# EAGLE board Middle Board (EAGLE 9.2.2)
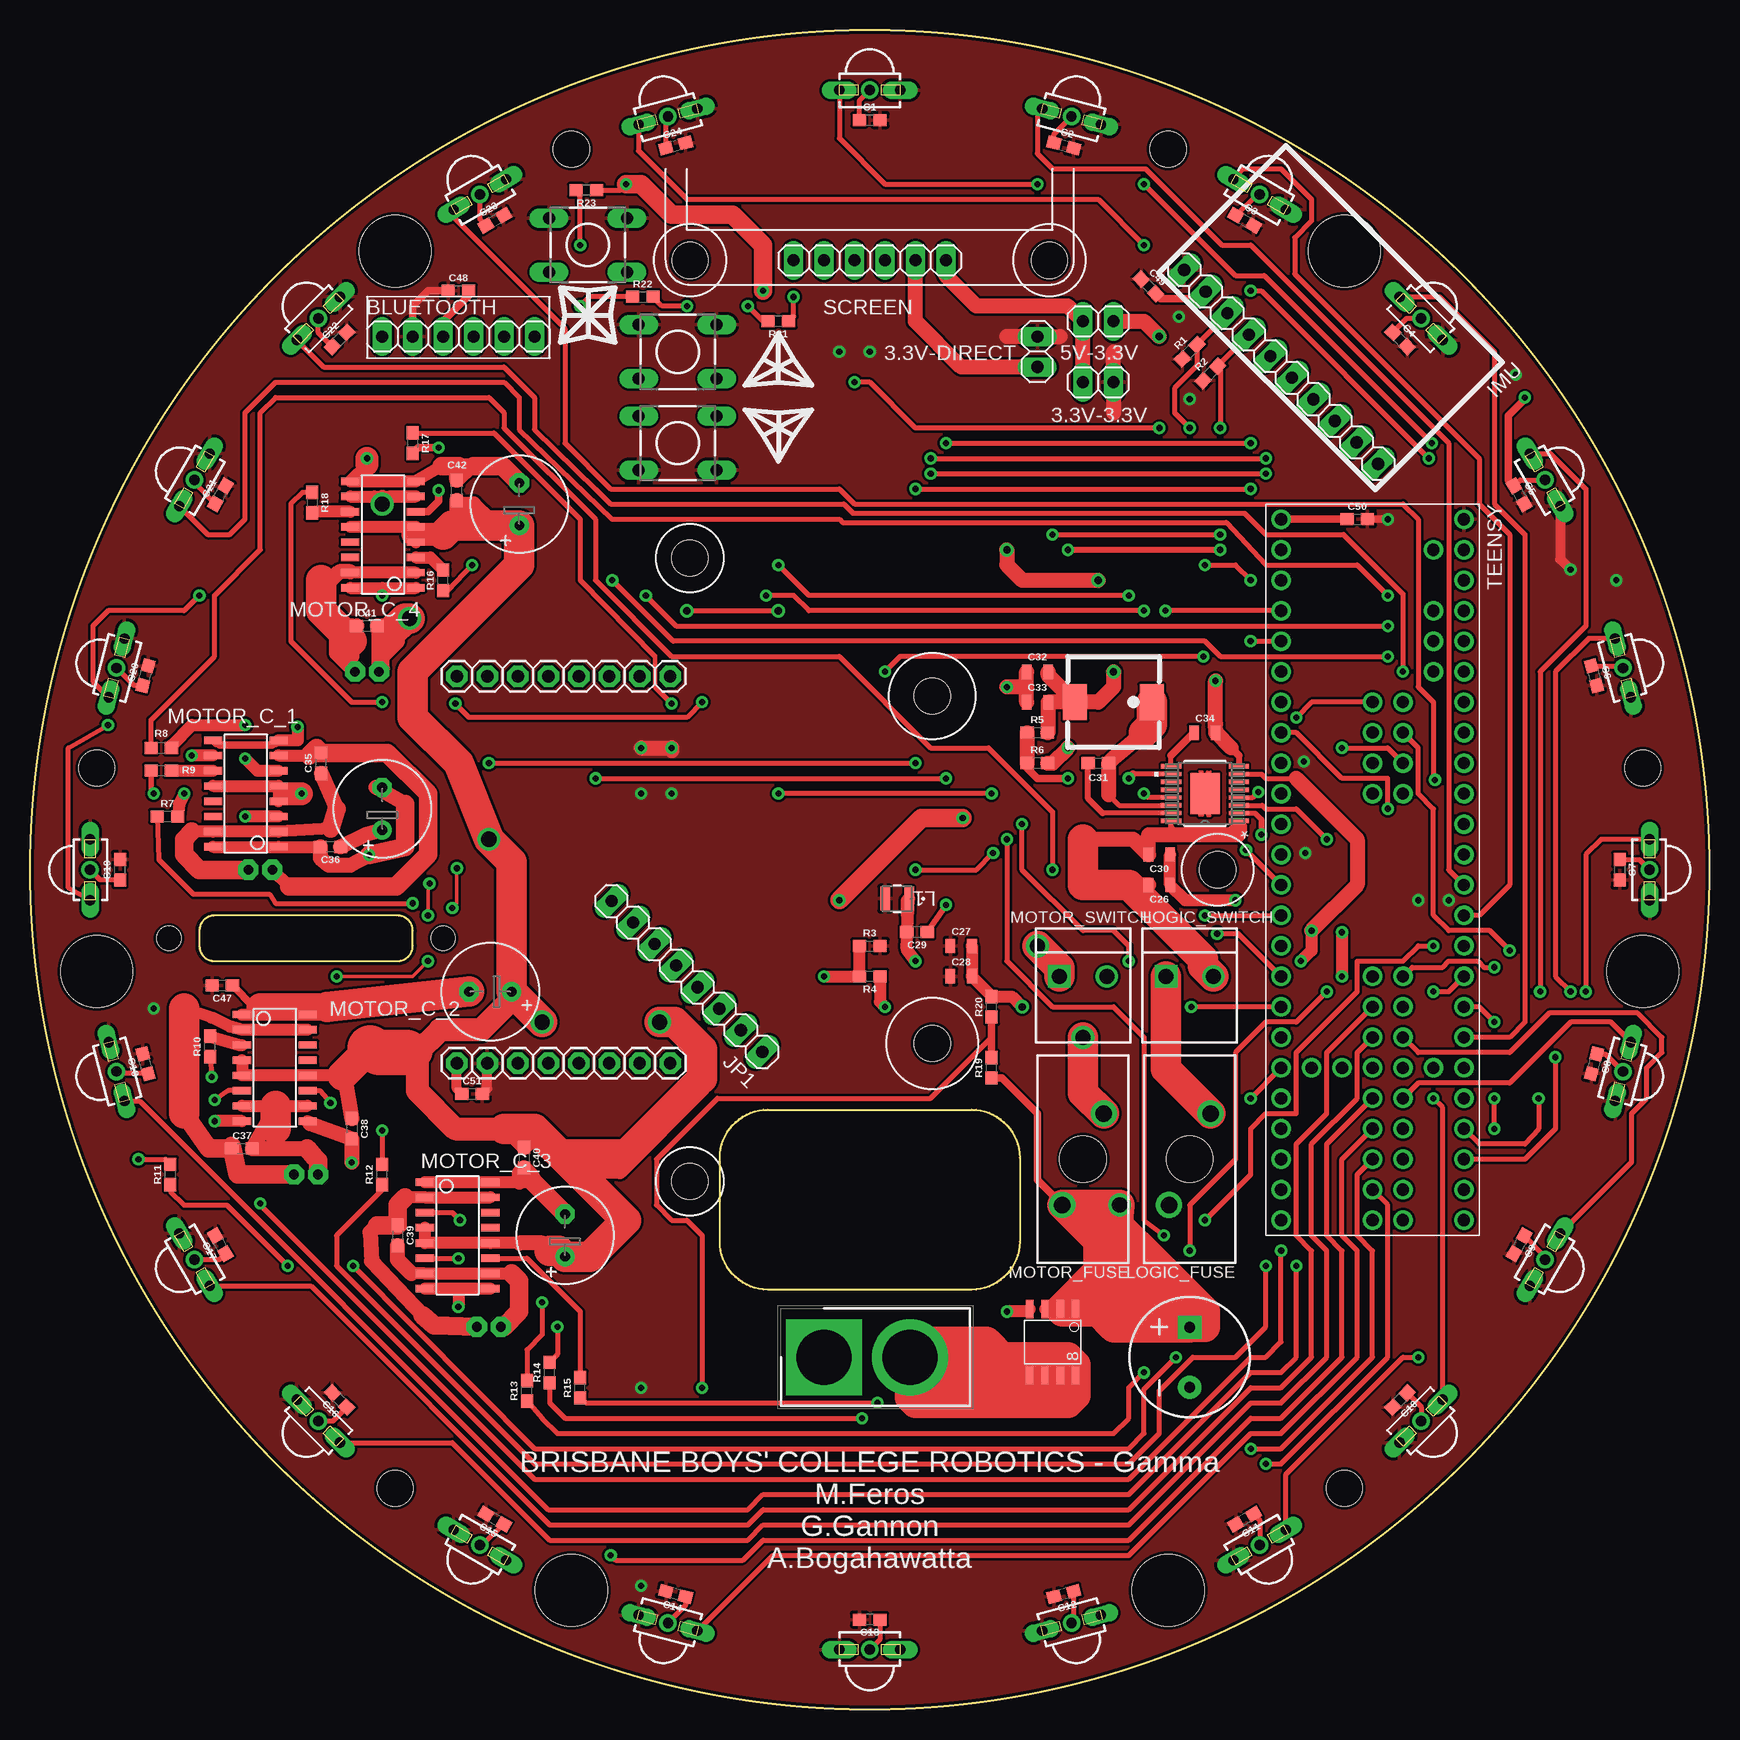
[diagram p0: board, top side]
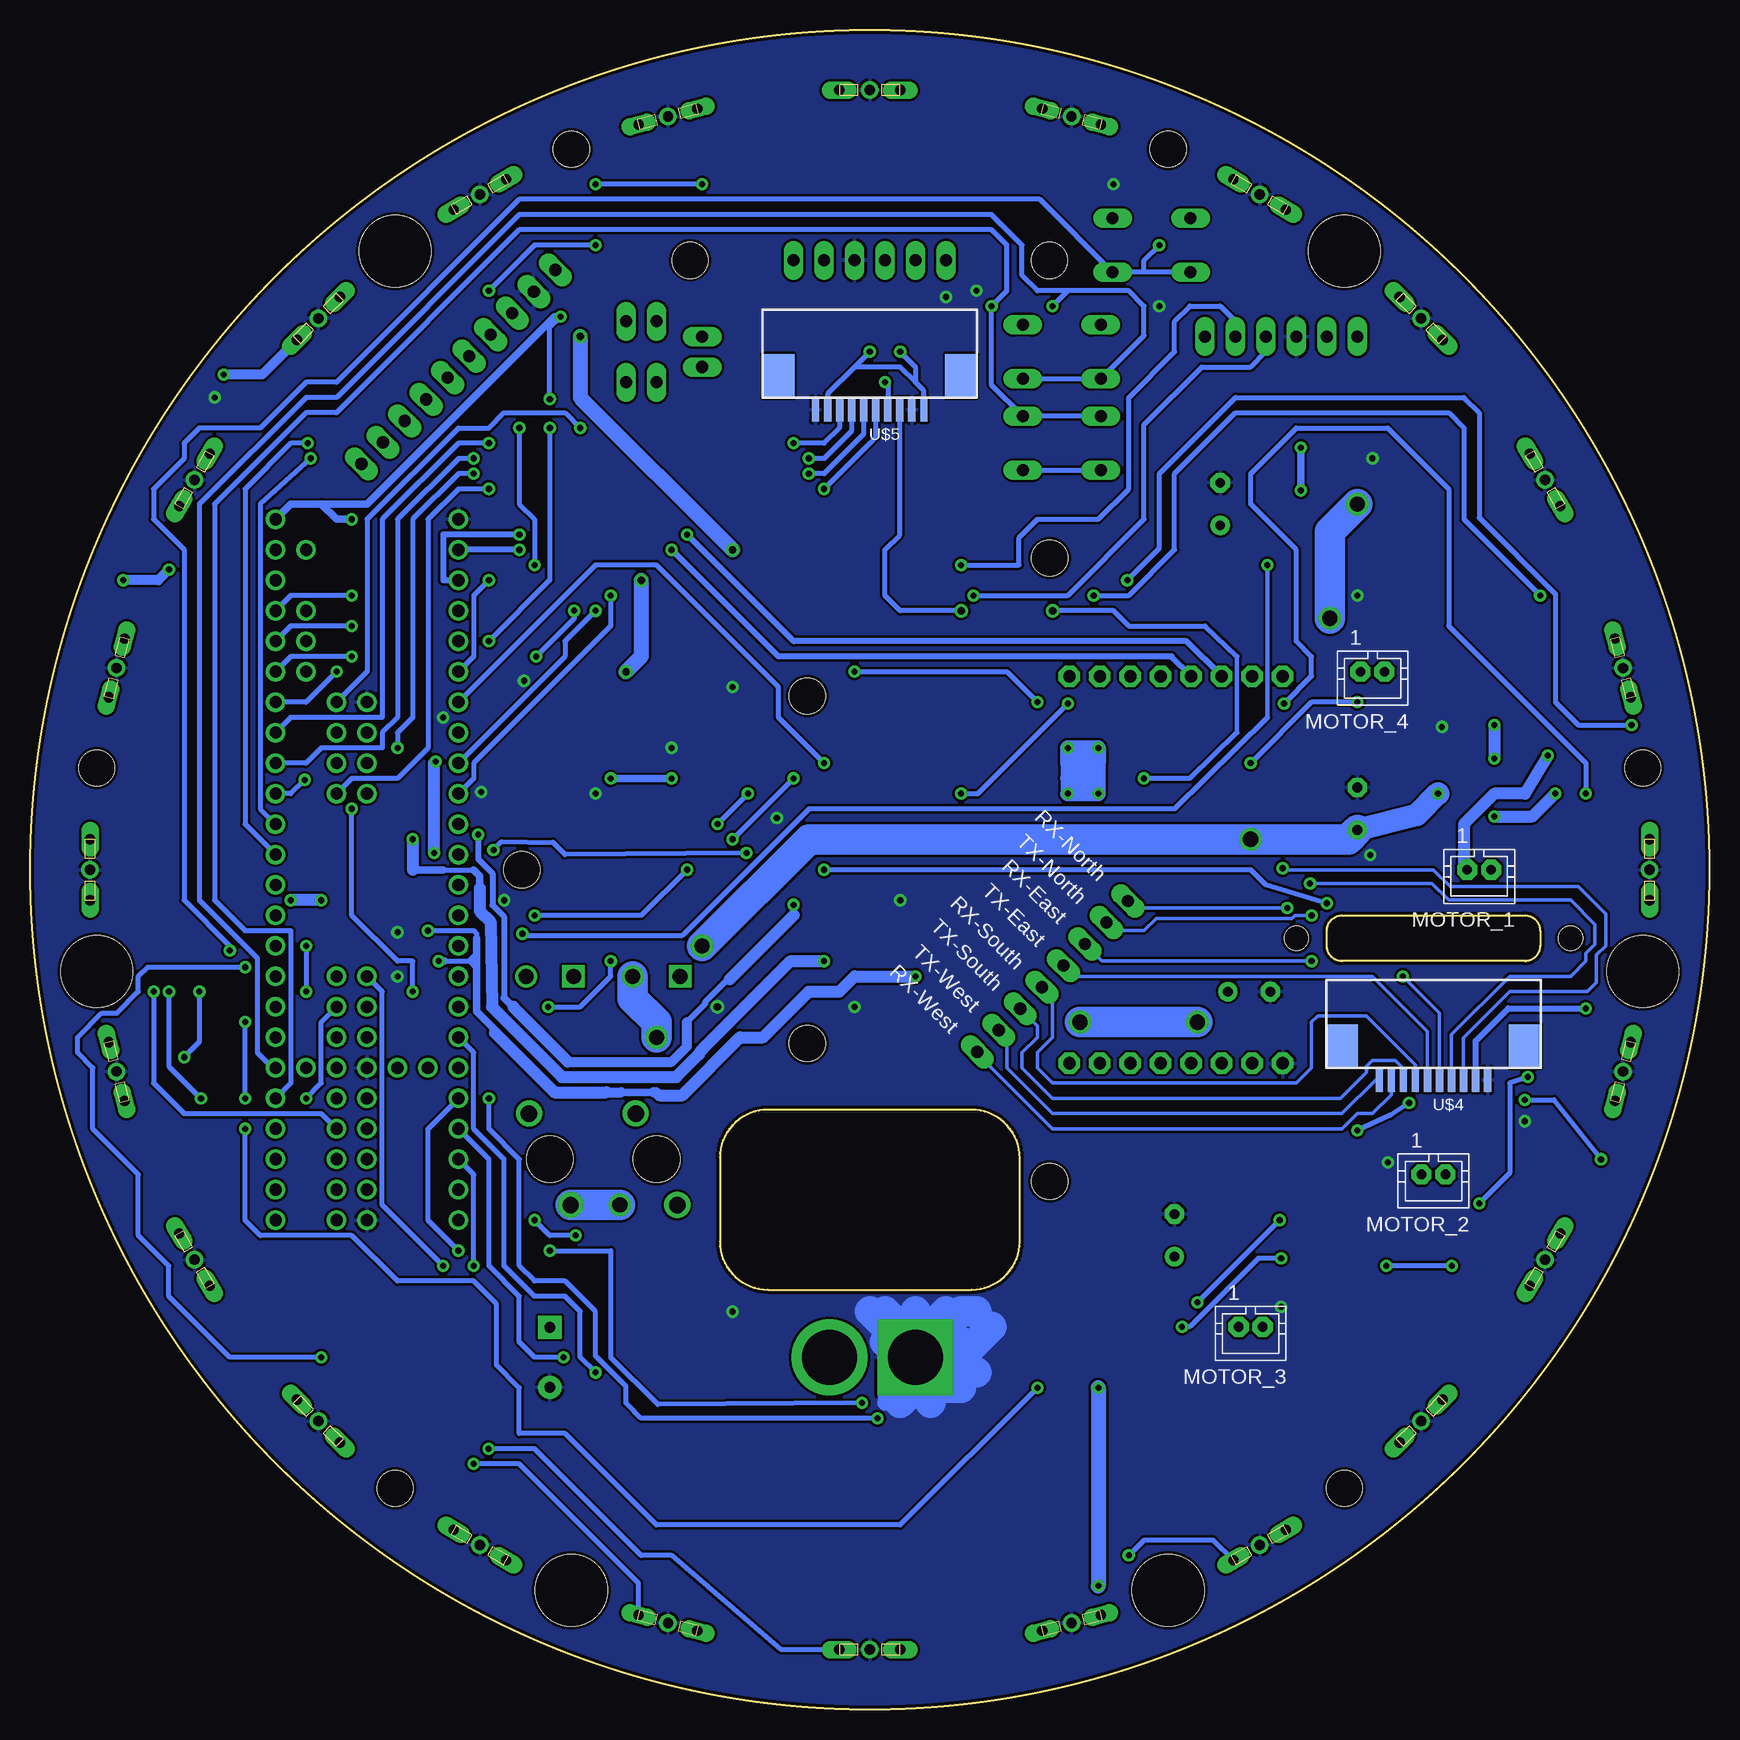
[diagram p1: board, bottom side, seen from below]

Size 140 x 140 mm. Coordinates in mm from the lower left corner, seen from the top.
Outline: 61.5,50 78.5,50 arc-90 82.5,46 82.5,39 arc-90 78.5,35 61.5,35 arc-90 57.5,39 57.5,46 arc-90 61.5,50
Outline: 14.12,64.92 14.12,63.65 arc90 15.39,62.38 30.63,62.38 arc90 31.9,63.65 31.9,64.92 arc90 30.63,66.19 15.39,66.19 arc90 14.12,64.92
Outline: circle at 70,70 radius 70
Copper layers (1*16): Top 0.035mm / dielectric 1.5mm / Bottom 0.035mm
Design rules "SparkFun": minimum track width 8mil, minimum drill 20mil, track to track 8mil, track to pad 8mil, pad to pad 8mil, via to via 8mil, smd to smd 8mil, copper to edge 10mil, drill to drill 8mil, minimum pad ring 12mil, minimum via ring 10mil, stop-mask expansion 4mil, vias tented up to drill 25mil, thermal gap 10mil
Holes 3 mm at 75.21,84.48 75.21,55.52 94.87,130.05 45.13,130.05 5.56,78.48 30.43,18.43 109.57,18.43 134.44,78.48 55,95.98 99,70 55,44.02 84.99,120.8 55.01,120.8
Holes 6 mm at 30.43,121.57 45.13,9.95 94.87,9.95 109.57,121.57 134.44,61.52 5.56,61.52
Holes 2 mm at 11.58,64.28 34.44,64.28

## Footprints (pad centres in the part's own frame; a part is rotated, then mirrored left to right if it is on the bottom)
1X02 = drill 1.016 long: 1 -1.27,0; 2 1.27,0
1X06 = drill 1.016 long: 1 -6.35,0; 2 -3.81,0; 3 -1.27,0; 4 1.27,0; 5 3.81,0; 6 6.35,0
0603 = smd 1.1 x 1: 1 -0.85,0; 2 0.85,0
CPOL-RADIAL-5MM-10MM = drill 0.9 pad 1.93 square: + 2.5,0 | drill 0.9 pad 1.93: - -2.5,0
0805 = smd 0.8 x 1.2: 1 -0.9,0; 2 0.9,0
E3,5-8 = drill 0.813 pad 1.6: + -1.778,0 | drill 0.813 pad 1.6 octagon: - 1.778,0
DTS-6 = drill 1 long: 1 -3.25,2.25; 2 3.25,2.25; 3 -3.25,-2.25; 4 3.25,-2.25
1X10 = drill 1.016 long: 1 -11.43,0; 2 -8.89,0; 3 -6.35,0; 4 -3.81,0; 5 -1.27,0; 6 1.27,0; 7 3.81,0; 8 6.35,0; 9 8.89,0; 10 11.43,0
SHDR2W320P716_1X2_1574X813X158 = drill 4.572 pad 6.35 square: 1 0,0 | drill 4.572 pad 6.35: 2 7.163,0
1X08 = drill 1.016 long: 1 -8.89,0; 2 -6.35,0; 3 -3.81,0; 4 -1.27,0; 5 1.27,0; 6 3.81,0; 7 6.35,0; 8 8.89,0
DFE252012P-1R0M=P2 = smd 0.8 x 2.007: 1 -1,0; 2 1,0
SL-1538 = drill 1.37 pad 2.184: P$1 1.73,3.81; P$2 -1.73,-3.81 | hole 3.88: 0,0
B2P-VH = drill 1.25 square: 1 -1.98,0 | drill 1.24: 2 1.98,0
JST-PH2 = drill 0.813 pad 1.676 octagon: 1 1,0; 2 -1,0
SO-16 = smd 0.61 x 1.524: 1 -4.445,-2.794; 2 -3.175,-2.794; 3 -1.905,-2.794; 4 -0.635,-2.794; 5 0.635,-2.794; 6 1.905,-2.794; 7 3.175,-2.794; 8 4.445,-2.794; 9 4.445,2.667; 10 3.175,2.667; 11 1.905,2.667; 12 0.635,2.667; 13 -0.635,2.667; 14 -1.905,2.667; 15 -3.175,2.667; 16 -4.445,2.667
OPENMV3 = drill 1.016 pad 1.778 octagon: 11 1.651,19.304; 12 1.651,16.764; 13 1.651,14.224; 14 1.651,11.684; 15 1.651,9.144; 16 1.651,6.604; 17 1.651,4.064; 18 1.651,1.524; 21 33.909,19.304; 22 33.909,16.764; 23 33.909,14.224; 24 33.909,11.684; 25 33.909,9.144; 26 33.909,6.604; 27 33.909,4.064; 28 33.909,1.524
TEENSY-3.5 = drill 1.016: 0 -7.62,26.67; 1 -7.62,24.13; 2 -7.62,21.59; 3 -7.62,19.05; 3.3V -7.62,-6.35; 3.3V-1 7.62,24.13; 3.3V-2 2.54,-29.21; 3.3V-3 -2.54,-16.51; 4 -7.62,16.51; 5 -7.62,13.97; 6 -7.62,11.43; 7 -7.62,8.89; 8 -7.62,6.35; 9 -7.62,3.81; 10 -7.62,1.27; 11 -7.62,-1.27; 12 -7.62,-3.81; 13 7.62,-3.81; 14 7.62,-1.27; 15 7.62,1.27; 16 7.62,3.81; 17 7.62,6.35; 18 7.62,8.89; 19 7.62,11.43; 20 7.62,13.97; 21 7.62,16.51; 22 7.62,19.05; 23 7.62,21.59; 24 -7.62,-8.89; 25 -7.62,-11.43; 26 -7.62,-13.97; 27 -7.62,-16.51; 28 -7.62,-19.05; 29 -7.62,-21.59; 30 -7.62,-24.13; 31 -7.62,-26.67; 32 -7.62,-29.21; 33 7.62,-29.21; 34 7.62,-26.67; 35 7.62,-24.13; 36 7.62,-21.59; 37 7.62,-19.05; 38 7.62,-16.51; 39 7.62,-13.97; 40 0,-8.89; 41 0,-11.43; 42 0,-13.97; 43 0,-19.05; 44 0,-21.59; 45 0,-24.13; 46 0,-26.67; 47 2.54,-26.67; 48 2.54,-24.13; 49 2.54,-21.59; 50 2.54,-19.05; 51 2.54,-13.97; 52 2.54,-11.43; 53 2.54,-8.89; 54 2.54,6.35; 55 2.54,8.89; 56 2.54,11.43; 57 2.54,13.97; A10 5.08,19.05; A11 5.08,16.51; AGND 7.62,26.67; AREF 5.08,21.59; DA0 7.62,-11.43; DA1 7.62,-8.89; DC 0,8.89; DD 0,6.35; DE 0,11.43; GND -7.62,29.21; GND-1 7.62,-6.35; GND-2 0,-29.21; GND-3 0,-16.51; GND-4 0,13.97; PRGRM 2.54,-16.51; RESET 5.08,-16.51; VBAT -5.08,-16.51; VIN 7.62,29.21; VUSB 5.08,26.67
MINICAST = drill 0.85 long: 1 0,2.54; 3 0,-2.54 | drill 0.85: 2 0,0
PWP16_3P4X2P46 = smd 1.676 x 0.356: 1 -2.819,2.275; 2 -2.819,1.625; 3 -2.819,0.975; 4 -2.819,0.325; 5 -2.819,-0.325; 6 -2.819,-0.975; 7 -2.819,-1.625; 8 -2.819,-2.275; 9 2.819,-2.275; 10 2.819,-1.625; 11 2.819,-0.975; 12 2.819,-0.325; 13 2.819,0.325; 14 2.819,0.975; 15 2.819,1.625; 16 2.819,2.275 | smd 2.46 x 3.4: 17 0,0
SO-8 = smd 1.524 x 0.61: 1 -2.743,1.905; 2 -2.743,0.635; 3 -2.743,-0.635; 4 -2.743,-1.905; 5 2.743,-1.905; 6 2.743,-0.635; 7 2.743,0.635; 8 2.743,1.905
DS75LC = smd 2 x 3: P$1 3.2,0; P$2 -3.2,0
FPC10 = smd 0.61 x 2.007: 1 -4.515,1.003; 2 -3.512,1.003; 3 -2.508,1.003; 4 -1.505,1.003; 5 -0.502,1.003; 6 0.502,1.003; 7 1.505,1.003; 8 2.508,1.003; 9 3.512,1.003; 10 4.515,1.003 | smd 2.667 x 3.607: N/C-1 -7.62,-1.803; N/C-2 7.62,-1.803

## Placement (x,y rotation side)
3.3V-3.3V  [1X02]  89.05,110.64 180 top
3.3V-DIRECT  [1X02]  83.97,113.18 270 top
5V-3.3V  [1X02]  89.05,115.72 180 top
BLUETOOTH  [1X06]  35.71,114.45 0 top
C1  0.1uF  [0603]  70,132.5 0 top
C2  0.1uF  [0603]  86.18,130.37 345 top
C3  0.1uF  [0603]  101.25,124.13 330 top
C4  0.1uF  [0603]  114.19,114.19 315 top
C5  0.1uF  [0603]  124.13,101.25 300 top
C6  0.1uF  [0603]  130.37,86.18 285 top
C7  0.1uF  [0603]  132.5,70 270 top
C8  0.1uF  [0603]  130.37,53.82 255 top
C9  0.1uF  [0603]  124.13,38.75 240 top
C10  0.1uF  [0603]  114.19,25.81 225 top
C11  0.1uF  [0603]  101.25,15.87 210 top
C12  0.1uF  [0603]  86.18,9.63 195 top
C13  0.1uF  [0603]  70,7.5 180 top
C14  0.1uF  [0603]  53.82,9.63 165 top
C15  0.1uF  [0603]  38.75,15.87 150 top
C16  0.1uF  [0603]  25.81,25.81 135 top
C17  0.1uF  [0603]  15.87,38.75 120 top
C18  0.1uF  [0603]  9.63,53.82 105 top
C19  0.1uF  [0603]  7.5,70 90 top
C20  0.1uF  [0603]  9.63,86.18 75 top
C21  0.1uF  [0603]  15.87,101.25 60 top
C22  0.1uF  [0603]  25.81,114.19 45 top
C23  0.1uF  [0603]  38.75,124.13 30 top
C24  0.1uF  [0603]  53.82,130.37 15 top
C25  1mF  [CPOL-RADIAL-5MM-10MM]  96.67,29.36 90 top
C26  10uF  [0805]  94.13,68.73 180 top
C27  22uF  [0805]  77.62,63.65 0 top
C28  22uF  [0805]  77.62,61.11 0 top
C29  0.1uF  [0603]  73.94,64.79 180 top
C30  10uF  [0805]  94.13,71.27 180 top
C31  0.1uF  [0603]  89.05,78.89 0 top
C32  22uF  [0805]  83.97,86.51 180 top
C33  22uF  [0805]  83.97,83.97 180 top
C34  1.0uF  [0805]  97.94,81.43 0 top
C35  0.1uF  [0603]  24.28,78.89 90 top
C36  0.1uF  [0603]  25.04,71.91 180 top
C37  0.1uF  [0603]  17.68,46.76 0 top
C38  0.1uF  [0603]  26.82,48.41 270 top
C39  0.1uF  [0603]  30.63,39.52 270 top
C40  0.1uF  [0603]  41.17,46 270 top
C41  0.1uF  [0603]  28.09,90.32 0 top
C42  0.1uF  [0603]  35.58,101.62 90 top
C43  470uF  [E3,5-8]  29.36,75.08 90 top
C44  470uF  [E3,5-8]  38.38,59.84 180 top
C45  470uF  [E3,5-8]  44.6,39.52 90 top
C46  470uF  [E3,5-8]  40.79,100.48 90 top
C47  0.1uF  [0603]  16.02,60.35 180 top
C48  0.1uF  [0603]  35.71,118.26 0 top
C49  0.1uF  [0603]  93.23,118.63 315 top
C50  0.1uF  [0603]  110.64,99.21 0 top
C51  0.1uF  [0603]  36.85,51.33 0 top
DOWN  DTS-6  [DTS-6]  54,113.18 0 top
IMU  [1X10]  104.29,111.91 315 top
J1  PRT-10474  [SHDR2W320P716_1X2_1574X813X158]  66.19,29.36 0 top
JP1  [1X08]  54.76,61.11 135 top
L1  DFE252012P-2R2M=P2  [DFE252012P-1R0M=P2]  72.29,67.59 180 top
LOGIC_FUSE  FUSE_MINI_BLADE  [SL-1538]  96.67,45.87 180 top
LOGIC_SWITCH  CONN_02_JST-VH  [B2P-VH]  96.67,61.11 0 top
MOTOR_1  [JST-PH2]  19.2,70 180 bottom
MOTOR_2  [JST-PH2]  23.01,44.6 180 bottom
MOTOR_3  [JST-PH2]  38.25,31.9 180 bottom
MOTOR_4  [JST-PH2]  28.09,86.51 180 bottom
MOTOR_C_1  VNH7100BASTR  [SO-16]  17.93,76.35 90 top
MOTOR_C_2  VNH7100BASTR  [SO-16]  20.47,53.49 270 top
MOTOR_C_3  VNH7100BASTR  [SO-16]  35.71,39.52 270 top
MOTOR_C_4  VNH7100BASTR  [SO-16]  29.36,97.94 90 top
MOTOR_FUSE  FUSE_MINI_BLADE  [SL-1538]  87.78,45.87 180 top
MOTOR_SWITCH  CONN_02_JST-VH  [B2P-VH]  87.78,61.11 0 top
OPEN-MV  OPENMV3  [OPENMV3]  34.06,87.78 270 top
R1  10k  [0603]  96.67,113.18 45 top
R2  10k  [0603]  98.4,111.38 45 top
R3  72.3  [0603]  70,63.65 0 top
R4  22.1  [0603]  70,61.11 180 top
R5  124  [0603]  83.97,81.43 0 top
R6  22.1  [0603]  83.97,78.89 180 top
R7  1k  [0603]  11.45,74.44 0 top
R8  1k  [0603]  10.95,80.16 0 top
R9  1k  [0603]  10.95,78.25 0 top
R10  1k  [0603]  15.01,55.27 90 top
R11  1k  [0603]  11.71,44.6 90 top
R12  1k  [0603]  29.36,44.6 90 top
R13  1k  [0603]  41.42,26.57 90 top
R14  1k  [0603]  43.33,28.09 90 top
R15  1k  [0603]  45.87,26.82 90 top
R16  1k  [0603]  34.44,94.13 90 top
R17  1k  [0603]  31.9,105.56 270 top
R18  1k  [0603]  23.52,100.61 270 top
R19  35.7kOhm  [0603]  80.16,53.49 90 top
R20  10.2kOhm  [0603]  80.16,58.57 90 top
R21  10k  [0603]  62.38,115.72 180 top
R22  10k  [0603]  51.08,117.75 0 top
R23  10k  [0603]  46.38,126.64 180 top
SCREEN  [1X06]  70,120.8 0 top
SELECT  DTS-6  [DTS-6]  46.5,122.07 0 top
TEENSY  TEENSY-3.5  [TEENSY-3.5]  111.91,70 0 top
TSSP1  TSSP58038  [MINICAST]  70,135 270 top
TSSP2  TSSP58038  [MINICAST]  86.82,132.79 255 top
TSSP3  TSSP58038  [MINICAST]  102.5,126.29 240 top
TSSP4  TSSP58038  [MINICAST]  115.96,115.96 225 top
TSSP5  TSSP58038  [MINICAST]  126.29,102.5 210 top
TSSP6  TSSP58038  [MINICAST]  132.79,86.82 195 top
TSSP7  TSSP58038  [MINICAST]  135,70 180 top
TSSP8  TSSP58038  [MINICAST]  132.79,53.18 165 top
TSSP9  TSSP58038  [MINICAST]  126.29,37.5 150 top
TSSP10  TSSP58038  [MINICAST]  115.96,24.04 135 top
TSSP11  TSSP58038  [MINICAST]  102.5,13.71 120 top
TSSP12  TSSP58038  [MINICAST]  86.82,7.21 105 top
TSSP13  TSSP58038  [MINICAST]  70,5 90 top
TSSP14  TSSP58038  [MINICAST]  53.18,7.21 75 top
TSSP15  TSSP58038  [MINICAST]  37.5,13.71 60 top
TSSP16  TSSP58038  [MINICAST]  24.04,24.04 45 top
TSSP17  TSSP58038  [MINICAST]  13.71,37.5 30 top
TSSP18  TSSP58038  [MINICAST]  7.21,53.18 15 top
TSSP19  TSSP58038  [MINICAST]  5,70 0 top
TSSP20  TSSP58038  [MINICAST]  7.21,86.82 345 top
TSSP21  TSSP58038  [MINICAST]  13.71,102.5 330 top
TSSP22  TSSP58038  [MINICAST]  24.04,115.96 315 top
TSSP23  TSSP58038  [MINICAST]  37.5,126.29 300 top
TSSP24  TSSP58038  [MINICAST]  53.18,132.79 285 top
U1  TPS54394PWPR  [PWP16_3P4X2P46]  97.94,76.35 180 top
U$2  SI4143DY  [SO-8]  85.24,30.63 270 top
U$3  DS75LC  [DS75LC]  90.32,83.97 180 top
U$4  FPC10  [FPC10]  23.01,53.49 180 bottom
U$5  FPC10  [FPC10]  70,109.37 180 bottom
UP  DTS-6  [DTS-6]  54,105.56 180 top

## Library data of the parts
3.3V-3.3V 3.3V-DIRECT 5V-3.3V BLUETOOTH IMU JP1 SCREEN = PinHead+
C1-C24 C35-C42 C47-C51 = SparkFun-Capacitors; PROD_ID: CAP-00810
C25 = SparkFun-Capacitors; PROD_ID: CAP-09538
C26 C30 = SparkFun-Capacitors; PROD_ID: CAP-11330
C27 C28 C32 C33 = SparkFun-Capacitors; PROD_ID: CAP-08402
C29 C31 = SparkFun-Capacitors; PROD_ID: CAP-08604
C34 = SparkFun-Capacitors; PROD_ID: CAP-08064
C43-C46 = adafruit
DOWN SELECT UP = switch-tact
J1 = XT60; ARROW_PART_NUMBER: PRT-10474; DESCRIPTION: Soldering Workstation Equipment XT60 Connectors Male/Female Pair; HEIGHT: 15.875mm; MANUFACTURER_NAME: SparkFun; MANUFACTURER_PART_NUMBER: PRT-10474
L1 = Inductor; MANUFACTURER_PART_NUMBER: DFE252012P2R2M=P2; VENDOR: Murata
LOGIC_FUSE MOTOR_FUSE = Fuse_Holder
LOGIC_SWITCH MOTOR_SWITCH = JST-VH
MOTOR_1-MOTOR_4 = jst-ph
MOTOR_C_1-MOTOR_C_4 = VNH7100BASTR
OPEN-MV = OpenMV
R1 R2 R21-R23 = SparkFun-Resistors; PROD_ID: RES-00824
R3-R6 R19 R20 = SparkFun-Resistors; PROD_ID: RES-09737
R7-R18 = SparkFun-Resistors; PROD_ID: RES-07856
TEENSY = teensy-3.5
TSSP1-TSSP24 = IR Receivers
U1 = TPS54394PWP; MANUFACTURER_PART_NUMBER: TPS54394PWPR; VENDOR: Texas Instruments
U$2 = MOSFET
U$3 = Inductor
U$4 U$5 = FFC

## Nets
3.3V: 3.3V-3.3V.1 3.3V-DIRECT.1 BLUETOOTH.2 C1.2 C2.2 C3.2 C4.2 C5.2 C6.2 C7.2 C8.2 C9.2 C10.2 C11.2 C12.2 C13.2 C14.2 C15.2 C16.2 C17.2 C18.2 C19.2 C20.2 C21.2 C22.2 C23.2 C24.2 C27.1 C28.1 C47.2 C48.1 C49.1 C50.2 C51.2 DOWN.1 DOWN.2 IMU.1 L1.2 OPEN-MV.27 R1.1 R2.1 R3.2 SELECT.1 SELECT.2 TEENSY.VIN TSSP1.1 TSSP2.1 TSSP3.1 TSSP4.1 TSSP5.1 TSSP6.1 TSSP7.1 TSSP8.1 TSSP9.1 TSSP10.1 TSSP11.1 TSSP12.1 TSSP13.1 TSSP14.1 TSSP15.1 TSSP16.1 TSSP17.1 TSSP18.1 TSSP19.1 TSSP20.1 TSSP21.1 TSSP22.1 TSSP23.1 TSSP24.1 U$4.2 U$5.1 U$5.9 UP.1 UP.2
5V: 5V-3.3V.1 C32.1 C33.1 R5.2 U$3.P$1
12V: C36.1 C38.1 C40.1 C42.1 C43.+ C44.+ C45.+ C46.+ MOTOR_C_1.4 MOTOR_C_1.5 MOTOR_C_1.12 MOTOR_C_2.4 MOTOR_C_2.5 MOTOR_C_2.12 MOTOR_C_3.4 MOTOR_C_3.5 MOTOR_C_3.12 MOTOR_C_4.4 MOTOR_C_4.5 MOTOR_C_4.12 MOTOR_SWITCH.1
BATTERY-VOLTAGE(ANALOG): R19.2 R20.1 TEENSY.DA0
BDOWN: DOWN.3 DOWN.4 R22.2 TEENSY.38
BSELECT: R23.2 SELECT.3 SELECT.4 TEENSY.56
BUP: R21.2 TEENSY.37 UP.3 UP.4
GND: BLUETOOTH.3 C1.1 C2.1 C3.1 C4.1 C5.1 C6.1 C7.1 C8.1 C9.1 C10.1 C11.1 C12.1 C13.1 C14.1 C15.1 C16.1 C17.1 C18.1 C19.1 C20.1 C21.1 C22.1 C23.1 C24.1 C25.- C26.1 C27.2 C28.2 C30.1 C32.2 C33.2 C34.2 C36.2 C38.2 C40.2 C42.2 C43.- C44.- C45.- C46.- C47.1 C48.2 C49.2 C50.1 C51.1 IMU.2 J1.1 MOTOR_C_1.1 MOTOR_C_1.8 MOTOR_C_1.9 MOTOR_C_1.16 MOTOR_C_2.1 MOTOR_C_2.8 MOTOR_C_2.9 MOTOR_C_2.16 MOTOR_C_3.1 MOTOR_C_3.8 MOTOR_C_3.9 MOTOR_C_3.16 MOTOR_C_4.1 MOTOR_C_4.8 MOTOR_C_4.9 MOTOR_C_4.16 OPEN-MV.28 R4.1 R6.1 R20.2 R21.1 R22.1 R23.1 SCREEN.4 TEENSY.GND TEENSY.GND-2 TEENSY.GND-3 TEENSY.GND-4 TSSP1.2 TSSP2.2 TSSP3.2 TSSP4.2 TSSP5.2 TSSP6.2 TSSP7.2 TSSP8.2 TSSP9.2 TSSP10.2 TSSP11.2 TSSP12.2 TSSP13.2 TSSP14.2 TSSP15.2 TSSP16.2 TSSP17.2 TSSP18.2 TSSP19.2 TSSP20.2 TSSP21.2 TSSP22.2 TSSP23.2 TSSP24.2 U1.4 U1.8 U1.13 U$2.4 U$4.1 U$5.2 U$5.10
LS-CONTROL1: TEENSY.19 U$5.8
LS-CONTROL2: TEENSY.18 U$5.7
LS-CONTROL3: TEENSY.55 U$5.6
LS-CONTROL4: TEENSY.54 U$5.5
LS-CONTROL5: TEENSY.57 U$5.4
LS-OUTPUT: TEENSY.DA1 U$5.3
MOTOR-BL(ENA): R16.1 TEENSY.24
MOTOR-BL(ENB): R17.1 TEENSY.25
MOTOR-BL(PWM): R18.1 TEENSY.5
MOTOR-BR(ENA): R13.1 TEENSY.26
MOTOR-BR(ENB): R14.1 TEENSY.27
MOTOR-BR(PWM): R15.1 TEENSY.6
MOTOR-FL(ENA): R7.1 TEENSY.11
MOTOR-FL(ENB): R8.1 TEENSY.12
MOTOR-FL(PWM): R9.1 TEENSY.2
MOTOR-FR(ENA): R10.1 TEENSY.28
MOTOR-FR(ENB): R11.1 TEENSY.29
MOTOR-FR(PWM): R12.1 TEENSY.30
N$1: J1.2 U$2.5 U$2.6 U$2.7 U$2.8
N$2: MOTOR_FUSE.P$2 MOTOR_SWITCH.2
N$3: C25.+ LOGIC_FUSE.P$1 MOTOR_FUSE.P$1 R19.1 U$2.1 U$2.2 U$2.3
N$4: LOGIC_FUSE.P$2 LOGIC_SWITCH.1
N$5: MOTOR_C_1.3 R7.2
N$6: C29.1 U1.2
N$7: C29.2 L1.1 U1.3
N$8: C31.1 U1.15
N$9: R3.1 R4.2 U1.7
N$10: C31.2 U1.14 U$3.P$2
N$11: C34.1 U1.9
N$12: MOTOR_C_1.6 R8.2
N$13: C26.2 C30.2 LOGIC_SWITCH.2 U1.1 U1.16
N$14: R5.1 R6.2 U1.10
N$15: MOTOR_C_1.11 R9.2
N$16: C35.1 MOTOR_1.2 MOTOR_C_1.2 MOTOR_C_1.15
N$17: C35.2 MOTOR_1.1 MOTOR_C_1.7 MOTOR_C_1.10
N$18: MOTOR_C_2.3 R10.2
N$19: MOTOR_C_2.6 R11.2
N$20: MOTOR_C_2.11 R12.2
N$21: C37.1 MOTOR_2.2 MOTOR_C_2.2 MOTOR_C_2.15
N$22: C37.2 MOTOR_2.1 MOTOR_C_2.7 MOTOR_C_2.10
N$23: MOTOR_C_3.3 R13.2
N$24: MOTOR_C_3.6 R14.2
N$25: MOTOR_C_3.11 R15.2
N$26: C39.1 MOTOR_3.2 MOTOR_C_3.2 MOTOR_C_3.15
N$27: C39.2 MOTOR_3.1 MOTOR_C_3.7 MOTOR_C_3.10
N$28: MOTOR_C_4.3 R16.2
N$29: MOTOR_C_4.6 R17.2
N$30: MOTOR_C_4.11 R18.2
N$31: C41.1 MOTOR_4.2 MOTOR_C_4.2 MOTOR_C_4.15
N$32: C41.2 MOTOR_4.1 MOTOR_C_4.7 MOTOR_C_4.10
N$33: TEENSY.47
N$34: TEENSY.31
N$35: 3.3V-DIRECT.2 SCREEN.5
N$36: TEENSY.32
N$37: 3.3V-3.3V.2 5V-3.3V.2 SCREEN.6
N$38: TEENSY.9
N$39: TEENSY.10
N$46: TEENSY.48
RX(BLUETOOTH): BLUETOOTH.5 TEENSY.8
RX(CAM): OPEN-MV.16 TEENSY.1
RXE: JP1.6 U$4.5
RXN: JP1.8 U$4.3
RXS: JP1.4 U$4.7
RXW: JP1.1 U$4.9
SCL(IMU): IMU.3 R1.2 TEENSY.3
SCREEN(SCL): SCREEN.2
SCREEN(SDA): SCREEN.1
SDA(IMU): IMU.4 R2.2 TEENSY.4
TSSP1: TEENSY.15 TSSP1.3
TSSP2: TEENSY.14 TSSP2.3
TSSP3: TEENSY.13 TSSP3.3
TSSP4: TEENSY.39 TSSP4.3
TSSP5: TEENSY.35 TSSP5.3
TSSP6: TEENSY.36 TSSP6.3
TSSP7: TEENSY.49 TSSP7.3
TSSP8: TEENSY.50 TSSP8.3
TSSP9: TEENSY.51 TSSP9.3
TSSP10: TEENSY.52 TSSP10.3
TSSP11: TEENSY.53 TSSP11.3
TSSP12: TEENSY.46 TSSP12.3
TSSP13: TEENSY.45 TSSP13.3
TSSP14: TEENSY.44 TSSP14.3
TSSP15: TEENSY.43 TSSP15.3
TSSP16: TEENSY.42 TSSP16.3
TSSP17: TEENSY.41 TSSP17.3
TSSP18: TEENSY.40 TSSP18.3
TSSP19: TEENSY.21 TSSP19.3
TSSP20: TEENSY.22 TSSP20.3
TSSP21: TEENSY.23 TSSP21.3
TSSP22: TEENSY.20 TSSP22.3
TSSP23: TEENSY.17 TSSP23.3
TSSP24: TEENSY.16 TSSP24.3
TX(BLUETOOTH): BLUETOOTH.4 TEENSY.7
TX(CAM): OPEN-MV.15 TEENSY.0
TXE: JP1.5 U$4.6
TXN: JP1.7 U$4.4
TXS: JP1.3 U$4.8
TXW: JP1.2 U$4.10
UU: TEENSY.34
UU2: TEENSY.33

## Tracks (layer width: path | path; a pad name or v marks a point on that pad's centre or on a via)
3.3V  (via drill 0.51)
  Top 0.61: v113.18,99.21 C50.2 | C48.1 33.17,118.26 31.9,116.99 BLUETOOTH.2
  Top 0.813: TSSP5.1 127.56,95.88 v128.42,95.02 | C51.2 38.12,51.75 OPEN-MV.27
  Top 1.27: 85.88,114.45 3.3V-DIRECT.1 81.43,114.45 | 90.32,113.18 3.3V-3.3V.1 90.32,108.1 | v50.95,80.16 v53.49,80.16 53.49,79.93
  Bottom 0.406: UP.1 UP.2 | v96.67,109.24 96.67,115.21 v95.78,116.1 | U$5.1 65.48,109.94 66.19,110.64 | U$5.9 73.51,109.67 71.27,111.91 | 66.19,110.64 67.46,111.91 71.27,111.91 | 71.27,111.91 v70,113.18 | v67.46,113.18 66.19,111.91 66.19,110.64
  Bottom 0.508: U$4.2 19.5,55.73 16.79,58.44 v10.31,58.44
  Bottom 0.61: TEENSY.VIN 118.26,100.48 115.72,100.48 | v95.78,116.1 96.29,116.1 111.91,100.48 115.72,100.48 | 115.72,100.48 114.45,99.21 v113.18,99.21
  Bottom 0.813: TSSP4.1 120.65,111.28 v123.85,111.28 | v128.42,95.02 129.31,94.13 v132.23,94.13
  Bottom 1.016: v106.32,71.4 106.32,78.89 v106.19,79.02 | v115.72,67.46 v118.26,67.46
  Bottom 1.27: v50.95,26.82 v50.95,10.31 | v50.95,80.16 v53.49,80.16 | v53.49,80.16 v53.49,76.35 | v53.49,76.35 v50.95,76.35 | v50.95,76.35 v50.95,80.16 | v50.95,80.16 50.95,78.89 v53.49,76.35 | v50.95,76.35 50.95,77.62 v53.49,80.16 | v50.95,80.16 53.49,77.62 v53.49,76.35 | v50.95,76.35 53.49,78.89 v53.49,80.16
  pour Top: 68.73,152.55 39.52,152.55 -10.01,103.02 -10.01,29.36 29.36,-10.01 133.5,-10.01 137.31,-13.82 171.6,20.47 171.6,73.81 171.6,109.37 152.55,128.42 128.42,152.55
5V  (via drill 0.61)
  Top 1.27: U$3.P$1 84.87,86.22 C32.1 | U$3.P$1 C33.1 84.87,81.48 R5.2 | 5V-3.3V.1 92.86,115.72 v94.13,114.45 | v81.43,96.67 81.43,95.4 82.7,94.13 v89.05,94.13 | v90.32,86.51 90.32,85.24 89.05,83.97 U$3.P$1
  Bottom 1.27: v94.13,114.45 94.13,109.37 v81.43,96.67 | v90.32,86.51 89.05,87.78 v89.05,94.13
12V  (via drill 0.51, 1.27)
  Top 1.016: MOTOR_C_1.12 MOTOR_C_1.5 | MOTOR_C_1.5 MOTOR_C_1.4 | MOTOR_C_1.5 21.36,76.35 | 26.06,52.86 MOTOR_C_2.12 MOTOR_C_2.5 MOTOR_C_2.4 | 40.79,38.89 MOTOR_C_3.12 MOTOR_C_3.5 MOTOR_C_3.4 | MOTOR_C_4.4 31.9,97.56 31.9,97.94 31.9,98.32 MOTOR_C_4.5 MOTOR_C_4.12
  Top 1.27: C36.1 28.09,72.96 C43.+ | 26.06,52.86 26.19,52.94 C38.1 | 43.33,38.25 42.7,38.89 40.79,38.89 | 35.2,98.7 35.58,99.08 C42.1 35.88,100.48 36.98,100.48 38.25,99.21 38.25,98.7 | 42.06,48.41 42.06,47.74 C40.1 39.61,48.41 | 56.03,52.6 49.3,45.87 44.6,45.87 | 56.03,52.6 56.03,51.71 49.17,44.85 45.62,44.85 | 56.03,52.6 55.14,52.6 49.43,46.89 44.73,46.89
  Top 1.905: 21.36,76.35 v22.63,76.35 | 34.44,97.94 31.9,97.94 | C44.+ 40.16,59.2 37.62,56.66 34.19,56.66 32.28,54.76 32.28,51.59 35.46,48.41 39.61,48.41
  Top 2.54: MOTOR_SWITCH.1 85.8,61.82 v83.97,63.65 | 39.52,48.41 39.61,48.41 42.06,48.41 44.6,45.87 45.62,44.85 49.68,40.79 46.63,37.74 C45.+ 44.09,38.25 43.33,38.25 | 26.06,52.86 28.34,55.14 | 34.44,97.94 35.2,98.7 38.25,98.7 C46.+ 40.79,95.4 31.9,86.51 31.9,82.7 35.71,78.89 v38.25,72.54 40.16,70.64 C44.+ v42.7,57.3 | v52.47,57.3 53.74,57.3 56.03,55.01 56.03,52.6 | 31.39,54.76 32.28,54.76
  Top 3.81: 28.34,55.14 29.11,54.76 31.39,54.76
  Bottom 1.905: v22.63,76.35 24.41,74.57 C43.+
  Bottom 2.54: v83.97,63.65 75.08,72.54 v38.25,72.54 30.12,72.54 C43.+ | v42.7,57.3 v52.47,57.3
BATTERY-VOLTAGE(ANALOG)  (via drill 0.51)
  Top 0.406: v56.03,26.82 56.03,39.52 54.76,40.79 53.49,40.79 52.22,42.06 52.22,45.87 54.76,48.41 57.3,50.95 75.08,50.95 80.16,56.03 | v122.07,48.41 v122.07,50.95 | v122.07,57.3 120.8,58.57 TEENSY.DA0
  Top 0.61: R20.1 80.16,56.03 R19.2
  Bottom 0.406: v56.03,26.82 67.46,15.39 87.78,15.39 95.4,23.01 99.21,23.01 99.21,26.82 101.11,28.73 101.11,33.8 103.02,35.71 109.37,35.71 113.18,39.52 120.8,39.52 122.07,40.79 v122.07,48.41 | v122.07,50.95 v122.07,57.3
BDOWN  (via drill 0.51)
  Top 0.406: v54.76,116.99 52.69,116.99 R22.2
  Bottom 0.406: DOWN.4 DOWN.3 47.14,114.54 47.14,116.99 48.41,118.26 53.49,118.26 | 53.49,118.26 56.03,118.26 57.3,119.53 57.3,122.07 59.84,124.61 99.21,124.61 114.45,109.37 116.99,109.37 125.88,100.48 125.88,67.46 121.05,62.63 121.05,54.76 119.78,53.49 TEENSY.38 | 53.49,118.26 v54.76,116.99
BSELECT  (via drill 0.51)
  Top 0.406: v45.87,122.07 45.87,126.3 R23.2 | v123.34,63.27 121.69,64.92 118.26,64.92 116.99,66.19 116.99,75.08 115.72,76.35 115.72,80.16 TEENSY.56
  Bottom 0.406: SELECT.3 47.14,119.82 | 47.14,119.82 SELECT.4 55.81,125.88 99.21,125.88 114.45,110.64 116.99,110.64 120.8,106.83 125.88,106.83 127.15,105.56 127.15,104.29 129.69,101.75 129.69,99.21 127.15,96.67 127.15,67.46 123.34,63.65 v123.34,63.27 | 47.14,119.82 47.14,120.8 v45.87,122.07
BUP  (via drill 0.51)
  Top 0.406: v59.84,116.99 61.11,115.72 R21.2
  Bottom 0.406: UP.4 UP.3 59.84,110.4 v59.84,116.99 58.57,118.26 58.57,122.07 59.84,123.34 99.21,123.34 114.45,108.1 116.99,108.1 124.61,100.48 124.61,67.46 122.07,64.92 118.26,64.92 118.26,52.22 TEENSY.37
GND  (via drill 0.51, 0.61)
  Top 0.406: C2.1 85.36,131.32 TSSP2.2 | C1.1 69.15,134.15 TSSP1.2 | C3.1 102.25,126.29 TSSP3.2 | C4.1 114.76,115.96 TSSP4.2 | C5.1 124.22,102.5 TSSP5.2 | C6.1 132.61,87 TSSP6.2 | C7.1 134.15,70.85 TSSP7.2 | C8.1 131.32,54.64 TSSP8.2 | C9.1 126.29,37.75 TSSP9.2 | C10.1 115.96,25.24 TSSP10.2 | C11.1 102.5,15.78 TSSP11.2 | C12.1 87,7.39 TSSP12.2 | C13.1 70.85,5.85 TSSP13.2 | C14.1 54.64,8.68 TSSP14.2 | C15.1 37.75,13.71 TSSP15.2 | C16.1 25.24,24.04 TSSP16.2 | C17.1 15.78,37.5 TSSP17.2 | C18.1 7.39,53 TSSP18.2 | C19.1 5.85,69.15 TSSP19.2 | C20.1 8.68,85.36 TSSP20.2 | C21.1 13.71,102.25 TSSP21.2 | C22.1 24.04,114.76 TSSP22.2 | C23.1 37.5,124.22 TSSP23.2 | C24.1 53,132.61 TSSP24.2 | U1.13 93.19,76.03 v92.86,76.35 | U1.4 101.93,76.03 v102.38,76.48 | R21.1 63.65,116.14 v63.65,117.75 | R23.1 49.17,126.64 v49.68,127.15 | R22.1 46.63,117.75 v45.87,116.99 | TEENSY.GND-4 106.83,83.97 v105.56,82.7
  Top 0.483: 100.76,79.51 U1.8
  Top 0.61: 100.11,80.16 100.76,79.51 | MOTOR_C_1.9 15.52,80.54 15.68,80.54 15.81,80.41 20.18,80.41 20.3,80.54 20.47,80.54 MOTOR_C_1.8 | 15.39,48.92 v15.39,49.05 | C5.1 123.21,102.47 123.21,107.85 124.61,109.24 v124.61,109.37 | C50.1 TEENSY.GND | C49.2 94.24,117.62 97.43,117.62 IMU.2 | BLUETOOTH.3 34.44,115.72 36.56,117.84 C48.2 | C47.1 18.65,58.57 19.2,58.57
  Top 0.813: C51.1 35.58,51.75 OPEN-MV.28
  Top 1.016: U$2.4 83.13,33.17 v81.43,33.17 | C30.1 C26.1 96.3,67.46 v100.48,67.46 | MOTOR_C_1.16 MOTOR_C_1.1 C36.2 | 28.85,76.86 C43.- | v22.3,81.91 22.32,80.8 MOTOR_C_1.8 | 23.35,48.83 MOTOR_C_2.9 | MOTOR_C_2.8 v15.39,49.05 | MOTOR_C_2.1 20.47,57.94 | 20.47,57.94 MOTOR_C_2.16 | MOTOR_C_3.1 MOTOR_C_3.16 40.79,43.97 41.93,43.97 | MOTOR_C_3.9 35.71,35.08 | 35.71,35.08 MOTOR_C_3.8 | 35.71,35.08 v35.71,33.55 | MOTOR_C_4.16 29.36,93.5 | 29.36,93.5 MOTOR_C_4.1 | 34.31,103.66 MOTOR_C_4.8 MOTOR_C_4.9 28.09,103.78 | 29.36,93.5 v29.36,92.86 | 19.2,58.57 20.47,57.94 | v109.37,64.79 v109.37,61.11 | R4.1 70.85,58.99 v71.27,58.57 | C27.2 C28.2 80.16,59.47 R20.2 81.85,59.42 v82.7,58.57
  Top 1.27: C33.2 83.07,85.24 | 83.07,85.24 C32.2 | 83.07,85.24 v81.43,85.24 | R6.1 85.24,78.89 v86.51,80.16 | v98.83,85.75 98.83,82.18 C34.2 100.11,80.16 | C36.2 24.19,70.98 24.91,70.38 26.69,70.38 v28.26,71.23 | 31.27,75.46 28.85,76.86 | 23.35,48.83 C38.2 v26.82,45.62 | 36.77,103.66 C42.2 35.58,103.53 35.71,103.66 36.77,103.66 | 36.77,103.66 36.98,103.66 | 40.79,43.97 40.79,44.77 C40.2 41.93,44.39 41.93,43.97
  Top 1.524: v28.26,71.23 31.27,71.91 31.27,75.46 | 41.93,43.97 C45.- | 34.31,103.66 35.71,103.66 | 36.98,103.66 39.39,103.66 C46.- | v49.68,127.15 50.95,127.15 53.49,124.61 58.57,124.61 61.11,122.07 v61.11,118.26 | v77.75,74.32 74.32,74.32 v67.46,67.46
  Top 1.905: 28.09,103.78 v28.09,104.29
  Top 2.286: 24.79,58.57 19.2,58.57
  Top 2.54: C44.- 24.79,58.57
  Bottom 1.27: J1.1 68.73,26.82 68.73,25.55
  Bottom 2.54: J1.1 62.38,29.36 59.84,31.9 | J1.1 64.92,30.63 62.38,30.63 | J1.1 66.19,33.17 | 66.19,30.63 63.65,33.17 | J1.1 62.38,33.17 61.11,33.17 | J1.1 66.19,30.63 | 66.19,30.63 68.73,33.17 | J1.1 70,33.17 | J1.1 67.46,29.36 68.73,30.63 | 64.92,28.09 61.11,28.09 | J1.1 63.65,26.82 62.38,26.82 | J1.1 64.92,28.09 | 64.92,28.09 64.92,25.55 | J1.1 66.19,26.82 67.46,25.55 67.46,28.09 J1.1
  pour Bottom: 66.19,142.39 23.01,142.39 -2.39,116.99 -3.66,115.72 -3.66,28.09 28.09,-3.66 35.71,-3.66 116.99,-3.66 130.96,10.31 147.47,26.82 147.47,80.16 147.47,111.91 128.42,130.96 116.99,142.39
LS-CONTROL1  (via drill 0.51)
  Top 0.406: v76.35,105.56 v101.75,105.56
  Bottom 0.406: TEENSY.19 118.26,82.7 110.64,82.7 110.64,99.21 104.29,105.56 v101.75,105.56 | v76.35,105.56 73.81,105.56 72.54,106.83 72.54,108.3 72.54,108.34 U$5.8
LS-CONTROL2  (via drill 0.51)
  Top 0.406: v75.08,104.29 v103.02,104.29
  Bottom 0.406: TEENSY.18 116.99,78.89 115.72,80.16 110.64,80.16 110.64,81.43 109.37,82.7 109.37,99.21 104.29,104.29 v103.02,104.29 | v75.08,104.29 73.81,104.29 71.49,106.61 71.49,108.35 U$5.7
LS-CONTROL3  (via drill 0.51)
  Top 0.406: v75.08,103.02 v103.02,103.02 | v109.37,80.16 113.18,80.16 TEENSY.55
  Bottom 0.406: v75.08,103.02 73.81,103.02 70.5,106.34 U$5.6 | v103.02,103.02 104.29,103.02 108.1,99.21 108.1,82.7 109.37,81.43 v109.37,80.16
LS-CONTROL4  (via drill 0.51)
  Top 0.406: v73.81,101.75 v101.75,101.75
  Bottom 0.406: v73.81,101.75 70,105.56 69.5,106.06 U$5.5 | v101.75,101.75 104.29,101.75 106.83,99.21 106.83,80.16 109.37,77.62 113.18,77.62 TEENSY.54
LS-CONTROL5  (via drill 0.51)
  Top 0.406: v94.13,106.83 73.81,106.83 70,110.64 v68.73,110.64
  Bottom 0.406: TEENSY.57 111.91,86.51 111.91,99.21 104.29,106.83 101.75,106.83 100.48,108.1 95.4,108.1 v94.13,106.83 | 68.51,110.42 v68.73,110.64 68.5,110.41 U$5.4
LS-OUTPUT  (via drill 0.51, 0.61)
  Top 0.406: v47.14,77.62 v76.35,77.62 | v81.43,72.54 81.43,62.38 85.24,58.57 90.32,58.57 92.86,56.03 92.86,40.79 v94.51,39.52 | v97.94,40.79 101.75,44.6 101.75,48.41 103.02,49.68 105.56,49.68 105.56,54.76 110.64,59.84 110.64,62.38 114.45,62.38 115.72,63.65 v116.99,63.65 | v54.76,91.59 v62.38,91.59 | v116.99,59.84 118.26,59.84 TEENSY.DA1
  Bottom 0.356: 39.39,87.78 39.39,81.43
  Bottom 0.406: 39.39,87.78 42.06,90.32 48.41,90.32 49.68,91.59 v54.76,91.59 | 39.39,81.43 43.33,77.62 v47.14,77.62 | v76.35,77.62 v81.43,72.54 | v94.51,39.52 96.67,39.52 v97.94,40.79 | v62.38,91.59 67.46,91.59 68.73,92.86 68.73,96.67 67.49,97.91 U$5.3 | v116.99,63.65 v116.99,59.84
MOTOR-BL(ENA)  (via drill 0.51)
  Top 0.406: R16.1 34.86,93.28 v36.85,95.4 | TEENSY.24 100.73,64.67 v98.96,64.67
  Bottom 0.356: v36.85,95.4 36.85,82.7
  Bottom 0.406: 36.85,82.7 44.6,75.08 75.08,75.08 85.62,64.54 98.83,64.54 v98.96,64.67
MOTOR-BL(ENB)  (via drill 0.51)
  Top 0.356: 52.09,87.78 52.09,85.24
  Top 0.406: R17.1 38.67,106.41 45.87,99.21 45.87,94.13 52.09,87.78 | 52.09,85.24 v53.49,83.84 | TEENSY.25 v96.8,58.57 | v91.59,62.38 91.59,63.65 90.32,64.92 87.78,64.92 82.7,70 v82.7,73.81 | v80.16,76.35 v62.38,76.35
  Bottom 0.406: v96.8,58.57 94.13,58.57 91.59,61.11 v91.59,62.38 | v82.7,73.81 v80.16,76.35 | v62.38,76.35 60.98,76.35 v53.49,83.84
MOTOR-BL(PWM)  (via drill 0.51)
  Top 0.406: R18.1 22.72,101.46 21.74,100.48 21.74,89.05 26.82,83.97 v29.36,83.97 | v38.25,78.89 v73.81,78.89
  Bottom 0.406: v29.36,83.97 33.17,83.97 v38.25,78.89 | v73.81,78.89 77.62,82.7 77.62,85.24 87.78,95.4 92.86,95.4 TEENSY.5
MOTOR-BR(ENA)  (via drill 0.51)
  Top 0.406: R13.1 42.7,24.28 43.97,23.01 90.32,23.01 91.59,24.28 91.59,26.82 v92.86,28.09
  Bottom 0.406: v92.86,28.09 94.13,29.36 94.13,33.17 95.4,34.44 97.94,34.44 100.48,36.98 100.48,45.87 103.02,48.41 103.02,54.76 TEENSY.26
MOTOR-BR(ENB)  (via drill 0.51)
  Top 0.406: R14.1 43.33,25.55 44.6,24.28 v69.36,24.28 | v101.75,50.95 TEENSY.27
  Bottom 0.406: v69.36,24.28 89.05,24.28 90.32,25.55 90.32,26.95 92.86,29.49 92.86,33.17 95.4,35.71 97.94,35.71 99.21,36.98 99.21,45.87 101.75,48.41 v101.75,50.95
MOTOR-BR(PWM)  (via drill 0.51)
  Top 0.406: R15.1 46.38,25.55 v70.64,25.55 | v113.18,75.08 113.18,77.62 109.37,77.62 105.56,81.43 TEENSY.6 | v108.1,59.84 105.56,57.3 103.02,57.3 100.48,54.76 100.48,45.87 96.67,42.06 v96.67,38.25
  Bottom 0.406: v70.64,25.55 87.65,25.42 91.59,29.36 91.59,38.25 v96.67,38.25 | v108.1,59.84 108.1,62.38 109.37,62.38 113.18,66.19 v113.18,75.08
MOTOR-FL(ENA)  (via drill 0.51)
  Top 0.406: R7.1 10.73,70.85 13.61,67.97 19.96,67.97 20.47,67.21 v31.9,67.21 | v73.81,70 78.89,70 v80.29,71.4 | v101.37,71.65 TEENSY.11
  Bottom 0.406: v31.9,67.21 36.98,68.73 38.25,70 v73.81,70 | v80.29,71.4 95.4,71.27 96.42,72.29 100.68,72.34 v101.37,71.65
MOTOR-FL(ENB)  (via drill 0.51)
  Top 0.406: R8.1 10.09,82.48 15.39,87.78 15.39,92.86 19.2,96.67 19.2,108.1 20.47,109.37 38.25,109.37 39.52,108.1 39.52,106.83 47.14,99.21 47.14,94.13 53.49,87.78 67.46,87.78 75.08,80.16 79.91,80.16 85.24,74.83 v85.24,70 | v97.94,66.19 TEENSY.12
  Bottom 0.406: v85.24,70 89.05,66.19 v97.94,66.19
MOTOR-FL(PWM)  (via drill 0.51)
  Top 0.406: 10.09,76.95 R9.1 10.09,76.56 v10.31,76.35 | TEENSY.2 v94.64,91.59 | v97.81,87.78 72.54,87.78 v71.27,86.51 | v56.03,83.97 54.76,82.7 36.6,82.7 v35.46,83.84
  Bottom 0.406: v10.31,76.35 10.31,78.89 21.74,90.32 21.74,101.75 26.82,106.83 34.44,106.83 38.25,103.02 38.25,100.48 34.44,96.67 34.44,89.05 33.17,87.78 33.17,86.13 v35.46,83.84 | v94.64,91.59 94.64,90.95 v97.81,87.78 | v71.27,86.51 58.57,86.51 v56.03,83.97
MOTOR-FR(ENA)  (via drill 0.51)
  Top 0.406: R10.1 v15.14,52.73 | v19.2,42.19 19.2,42.06 42.06,19.2 91.59,19.2 101.75,29.36 103.02,29.36 104.29,30.63 v104.29,38.25
  Bottom 0.406: v15.14,52.73 16.66,52.22 16.66,44.73 v19.2,42.19 | TEENSY.28 106.83,48.41 106.83,40.79 v104.29,38.25
MOTOR-FR(ENB)  (via drill 0.51)
  Top 0.406: v21.49,36.98 16.41,42.06 12.85,42.06 11.71,43.2 R11.1 | v26.95,36.98 42.06,21.74 91.59,21.74 92.86,23.01 92.86,26.69 v95.53,29.36
  Bottom 0.406: v21.49,36.98 v26.95,36.98 | v95.53,29.36 97.94,29.36 99.21,30.63 99.21,34.44 101.75,36.98 101.75,45.87 TEENSY.29
MOTOR-FR(PWM)  (via drill 0.51)
  Top 0.406: R12.1 29.36,43.33 25.55,39.52 25.55,36.98 42.06,20.47 91.59,20.47 94.13,23.01 94.13,26.57 96.92,29.36 100.48,29.36 103.02,31.9 v103.02,36.98
  Bottom 0.406: v103.02,36.98 103.02,44.6 TEENSY.30
N$1
  Top 2.54: J1.2 81,29.36 | U$2.8 U$2.7 | U$2.7 U$2.6 | U$2.6 U$2.5 | 81,29.36 82.47,27.89 | 82.47,27.89 U$2.6 | J1.2 75.89,26.82 82.7,26.82 82.7,27.66 82.47,27.89 | J1.2 73.35,26.01 73.81,25.55 83.54,25.55 | 83.54,25.55 U$2.7 | J1.2 74.62,30.63 79.73,30.63 81,29.36 | 83.54,25.55 84.81,25.55 | 84.81,25.55 U$2.8 | U$2.8 87.14,26.19 86.51,25.55 84.81,25.55 | U$2.8 87.14,28.73 86.51,29.36 81,29.36
N$2  (via drill 1.27)
  Top 2.54: MOTOR_FUSE.P$2 87.78,51.41 v87.78,56.03
  Bottom 2.54: v87.78,56.03 87.78,57.3 89.76,59.28 MOTOR_SWITCH.2
N$3  (via drill 1.27)
  Top 0.61: MOTOR_FUSE.P$1 83.97,44.14 83.97,49.68 81.01,52.64 R19.1
  Top 1.016: U$2.3 U$2.2
  Top 2.54: U$2.2 U$2.1 | U$2.1 89.05,35.28 | 89.05,39.06 MOTOR_FUSE.P$1 v90.83,42.06 | 89.05,35.28 89.05,36.55 | 89.05,36.55 89.05,39.06 | 89.05,39.06 90.32,40.33 v90.83,42.06 | 89.05,35.28 93.25,35.28 94.75,33.78 | 94.75,33.78 C25.+ | U$2.2 89.05,36.55 | U$2.1 94.33,33.37 94.75,33.78 | U$2.1 90.12,33.37 91.63,31.86 | 91.63,31.86 C25.+ | v90.83,42.06 90.32,36.98 94.13,36.98 | C25.+ 96.71,31.9 97.94,31.9 97.94,33.17 94.13,36.98 | v90.83,42.06 90.32,40.79 94.13,36.98 | U$2.2 86.08,33.17 89.05,33.17 90.36,31.86 91.63,31.86
  Bottom 2.54: v90.83,42.06 LOGIC_FUSE.P$1
N$4
  Top 2.54: LOGIC_SWITCH.1 94.69,53.39 LOGIC_FUSE.P$2
N$5  (via drill 0.51)
  Top 1.016: MOTOR_C_1.3 v17.93,74.44 | v12.85,76.35 12.43,75.5 R7.2
  Bottom 1.016: v17.93,74.44 14.76,74.44 v12.85,76.35
N$6  (via drill 0.51)
  Top 0.406: U1.2 102.1,74.72 102.64,74.19
  Top 0.508: 102.64,74.19 v102.64,72.92 | v76.35,67.08 C29.1
  Bottom 0.508: v102.64,72.92 102.64,70.89 101.44,69.69 101.44,67.06 100.48,66.09 100.48,59.33 | 76.35,66.19 v76.35,67.08 | 81.68,60.86 81.85,60.86 83.72,58.99 83.72,58.82 85.24,57.3
  Bottom 0.61: 100.48,59.33 99.72,58.57
  Bottom 0.813: 95.15,54 86.51,54 85.24,55.27 85.24,57.3
  Bottom 1.016: 81.68,60.86 76.35,66.19 | 99.72,58.57 95.15,54
N$7  (via drill 0.51)
  Top 0.406: U1.3 102.72,75.38 103.02,75.08 105.56,75.08 v108.1,72.54
  Top 1.016: C29.2 73.06,67.44 L1.1 73.06,63.38 v73.81,62.38
  Bottom 0.406: 105.56,70 103.02,70
  Bottom 0.61: 108.1,70 105.56,70 | 103.02,70 102.51,69.49 102.51,68.48
  Bottom 1.016: v108.1,72.54 108.1,70 | 102.51,68.48 102.51,66.57 101.62,65.68 101.5,58.57 95.65,52.73 86.13,52.73 84.22,54.63 83.97,55.01 76.6,62.38 v73.81,62.38
N$8
  Top 0.406: U1.15 89.41,74.72
  Top 0.508: C31.1 88.2,75.93 89.41,74.72
N$9  (via drill 0.51)
  Top 0.406: U1.7 102.66,77.97 103.02,77.62 105.56,77.62
  Top 1.016: R3.1 R4.2 v66.19,61.11 | v106.83,64.92 106.83,63.27 v105.94,62.38
  Top 1.27: 105.56,77.62 110.64,72.54 110.64,68.73 v106.83,64.92
  Bottom 0.406: v106.83,64.92 103.02,64.92 102.77,64.67 102.77,64.28 | 105.43,62.38 103.4,62.38 | 103.4,62.38 103.02,62.38 | 103.4,62.38 102.77,63.02 | 103.4,62.38 102.77,61.74
  Bottom 0.61: 101.24,56.41 101.24,56.66 102.77,58.19 102.77,61.74 102.77,63.02 102.77,64.28 | v105.94,62.38 105.43,62.38 | 90.7,51.46 88.03,51.46
  Bottom 0.813: 91.97,51.46 90.7,51.46 | 88.03,51.46 87.78,51.46 87.53,51.2
  Bottom 1.016: 91.97,51.46 96.29,51.46 101.24,56.41 | 87.53,51.2 85.62,51.2 80.8,56.03 78.89,56.03 75.08,59.84 72.54,59.84 71.27,61.11 v66.19,61.11
N$10
  Top 0.406: 89.9,76.26 90.79,75.38 U1.14
  Top 1.27: 92.86,81.43 90.32,79.31 C31.2 89.9,76.26
  Top 2.54: U$3.P$2 93.52,82.09 92.86,81.43
N$11
  Top 0.406: U1.9 95.12,79.51
  Top 0.61: 95.12,79.51 C34.1
N$12  (via drill 0.51)
  Top 1.016: MOTOR_C_1.6 18.95,78.25 v17.93,79.27 | R8.2 11.8,80.38 13.48,82.06 v17.93,82.06
  Bottom 1.016: v17.93,82.06 v17.93,79.27
N$13
  Top 0.406: 95.12,73.58 U1.16 | 100.73,74.05 U1.1 | U1.1 99.61,72.92 99.21,72.92 | U1.1 100.85,74.08 101.24,73.68 101.24,73.17 100.73,73.68 100.73,73.81
  Top 0.508: 95.78,72.92 95.12,73.58 | 100.73,72.92 100.73,73.81 100.73,74.05
  Top 1.27: 87.78,72.54 91.96,72.54 C30.2 93.23,72.91 93.24,72.92 95.78,72.92 99.21,72.92 100.73,72.92 | C26.2 91.59,68.73
  Top 2.54: LOGIC_SWITCH.2 97.76,62 97.76,62.56 91.59,68.73 87.78,68.73 87.78,72.54
N$14  (via drill 0.51)
  Top 0.406: U1.10 91.94,77.97
  Top 0.61: 91.94,77.97 v91.59,77.62 | v86.51,77.62 83.97,77.62 83.12,78.47 R6.2
  Top 1.27: R5.1 R6.2
  Bottom 0.61: v91.59,77.62 v86.51,77.62
N$15
  Top 1.016: R9.2 MOTOR_C_1.11
N$16
  Top 1.016: 25.04,73.43 MOTOR_C_1.2 MOTOR_C_1.15 13.48,73.17
  Top 1.27: C35.1 25.55,75.08
  Top 1.524: 25.55,75.08 25.04,73.43 | 13.48,73.17 12.85,72.54 12.85,71.27 14.12,70 MOTOR_1.2
N$17  (via drill 0.51)
  Top 1.016: MOTOR_C_1.7 23.26,79.53 | 21.6,68.6 MOTOR_1.1 | MOTOR_C_1.10 v13.48,79.53
  Top 1.524: 23.26,79.53 23.9,80.16 23.9,79.74 C35.2 29.78,79.74 33.17,76.35 33.17,71.27 30.5,68.6 21.6,68.6
  Bottom 1.016: v13.48,79.53 15.39,76.35 17.93,76.35 20.47,73.81 20.47,70.27 MOTOR_1.1
N$18
  Top 1.016: R10.2 17.46,55.39 MOTOR_C_2.3
N$19  (via drill 0.51)
  Top 0.406: MOTOR_C_2.6 16.53,51.59 v15.39,50.82 | v9.04,45.87 11.29,45.87 R11.2
  Bottom 0.406: v15.39,50.82 12.98,50.82 v9.04,45.87
N$20  (via drill 0.51)
  Top 0.406: MOTOR_C_2.11 24.15,51.59 v25.04,50.57 | v29.36,48.28 R12.2
  Bottom 0.406: v25.04,50.57 26.57,49.55 v29.36,48.28
N$21
  Top 1.016: MOTOR_C_2.15 MOTOR_C_2.2 16.66,56.92 15.14,57.68 12.85,58.44
  Top 1.524: 12.85,49.68 14.88,46.76 C37.1 16.83,46.97 17.3,44.6 MOTOR_2.2
  Top 2.54: 12.85,58.44 12.85,49.68
N$22
  Top 1.016: MOTOR_C_2.7 20.47,50.31 MOTOR_C_2.10
  Top 1.27: 20.47,48.41 19.8,49.01 C37.2 23.12,46.76 | 23.77,46 24.01,45.76
  Top 1.524: 23.12,46.76 23.77,46 | 24.01,45.76 MOTOR_2.1
  Top 2.54: 20.47,50.31 20.47,48.41
N$23  (via drill 0.51)
  Top 0.406: MOTOR_C_3.3 35.2,41.42 v35.84,40.79 | v42.7,33.93 42.7,31.27 41.42,29.99 R13.2
  Bottom 0.406: v35.84,40.79 v42.7,33.93
N$24  (via drill 0.51)
  Top 0.406: MOTOR_C_3.6 v35.71,37.62 | v43.97,31.9 43.97,29.61 R14.2
  Bottom 0.406: v35.71,37.62 37.62,37.62 43.33,31.9 v43.97,31.9
N$25
  Top 0.406: MOTOR_C_3.11 41.42,37.62 45.87,33.17 R15.2
N$26
  Top 1.016: MOTOR_C_3.15 MOTOR_C_3.2 31.27,42.7
  Top 1.27: 28.94,40.37 28.34,39.77 28.47,37.36 32.73,32.85
  Top 1.524: 31.27,42.7 30.63,42.06 C39.1 28.94,40.37 | 32.73,32.85 33.68,32.03 MOTOR_3.2
N$27
  Top 1.016: 31.77,36.34 MOTOR_C_3.7 MOTOR_C_3.10 40.16,36.34
  Top 1.27: 31.77,36.34 30.63,37.49 C39.2 | 39.52,31.9 MOTOR_3.1
  Top 1.524: 40.16,36.34 40.79,35.71 40.79,33.17 39.52,31.9
N$28
  Top 1.016: MOTOR_C_4.3 33.38,96.03 R16.2
N$29  (via drill 0.51)
  Top 0.61: MOTOR_C_4.6 33.17,99.84 34.06,100.73 v34.06,101.62 | v34.06,105.18 32.37,105.18 R17.2
  Bottom 0.61: v34.06,101.62 v34.06,105.18
N$30
  Top 1.016: MOTOR_C_4.11 23.86,99.84 R18.2
N$31
  Top 0.406: MOTOR_C_4.15 26.69,94.84
  Top 1.016: MOTOR_C_4.2 MOTOR_C_4.15
  Top 1.27: MOTOR_4.2 25.55,88.05 25.55,89.05 26.82,90.32 C41.1 26.82,89.9 26.82,89.05 26.82,87.78 | 24.28,94.13 25.08,94.13 25.79,94.84 26.69,94.84
  Top 2.54: 26.82,89.05 24.28,91.59 24.28,94.13
N$32  (via drill 1.27)
  Top 1.016: MOTOR_C_4.10 MOTOR_C_4.7 29.99,101.11 v29.36,100.48 28.73,101.11 MOTOR_C_4.10
  Top 1.27: 29.36,87.78 29.36,86.78 MOTOR_4.1 29.09,90.17 C41.2 29.36,90.32 29.99,89.69 30.63,89.05 29.36,87.78 | 29.36,87.78 29.36,89.05 | v29.36,100.48 29.36,101.04
  Top 2.54: 29.99,89.69 31.27,90.95 v31.65,90.95
  Bottom 2.54: v31.65,90.95 31.65,98.19 v29.36,100.48
N$35
  Top 1.27: 3.3V-DIRECT.2 77.62,111.91 73.81,115.72 SCREEN.5
N$37
  Top 1.27: SCREEN.6 76.35,119.53 78.89,116.99 86.51,116.99 5V-3.3V.2 3.3V-3.3V.2
RX(BLUETOOTH)  (via drill 0.51)
  Top 0.406: v91.59,92.86 64.92,92.86 v62.38,95.4
  Bottom 0.406: v91.59,92.86 91.59,90.32 103.02,78.89 103.02,77.62 TEENSY.8 | v62.38,95.4 57.55,95.4 57.55,97.69 56.03,99.21 50.95,99.21 48.41,101.75 48.41,109.37 44.6,113.18 44.6,115.72 43.33,116.99 40.79,116.99 39.52,115.72 BLUETOOTH.5
RX(CAM)  (via drill 0.51)
  Top 0.406: v85.24,97.94 v99.21,97.94
  Bottom 0.508: OPEN-MV.16 43.58,89.05 76.35,89.05 v85.24,97.94 | v99.21,97.94 105.56,97.94 105.56,94.13 TEENSY.1
RXE  (via drill 0.51)
  Top 0.305: v25.55,61.11 31.9,61.11 v33.17,62.38
  Bottom 0.305: U$4.5 22.51,58.07 v25.55,61.11 | v33.17,62.38 50.64,62.38 JP1.6
RXN  (via drill 0.51)
  Top 0.305: v35.58,70.13 35.58,67.21 v35.2,66.83
  Bottom 0.305: U$4.3 20.5,56 16.66,59.84 10.18,59.84 9.42,60.6 9.42,62.89 8.66,63.65 8.66,66.32 10.95,68.6 21.61,68.6 23.01,70 35.46,70 v35.58,70.13 | v35.2,66.83 47.9,66.83 JP1.8
RXS
  Bottom 0.305: U$4.7 24.52,53.73 28.6,57.81 32.66,57.81 33.17,57.3 33.17,53.49 34.44,52.22 54.76,52.22 56.03,53.49 56.03,54.76 54.76,56.03 54.76,59.31 JP1.4
RXW
  Bottom 0.305: U$4.9 26.52,51.25 28.09,49.68 29.36,49.68 30.63,48.41 54.76,48.41 61.05,54.7 JP1.1
SCL(IMU)  (via drill 0.51)
  Top 0.406: IMU.3 99.8,116.31 R1.2 97.27,112 95.4,110.13 95.4,108.1 v96.67,106.83 | v101.75,89.05 TEENSY.3
  Bottom 0.406: v96.67,106.83 96.67,94.13 v101.75,89.05
SDA(IMU)  (via drill 0.51)
  Top 0.406: IMU.4 101.6,114.58 R2.2 99.21,111.77 v99.21,106.83 | v97.94,95.4 100.48,95.4 v101.75,94.13
  Bottom 0.406: v99.21,106.83 99.21,100.48 97.94,99.21 v97.94,95.4 | v101.75,94.13 103.02,92.86 103.02,87.78 TEENSY.4
TSSP1  (via drill 0.51)
  Top 0.406: TSSP1.3 67.46,130.96 71.27,127.15 v83.97,127.15 | v92.86,127.15 100.48,119.53 102.89,119.53 v116.86,105.56
  Bottom 0.406: v116.86,105.56 118.26,105.56 122.07,101.75 122.07,73.81 TEENSY.15 | v83.97,127.15 v92.86,127.15
TSSP2
  Top 0.406: TEENSY.14 118.26,70 118.26,105.56 101.75,122.07 99.34,122.07 92.99,128.42 85.24,128.42 83.97,129.69 83.97,133.04 TSSP2.3
TSSP3
  Top 0.406: TSSP3.3 101.16,128.42 104.29,128.42 106.83,125.88 106.83,124.1 105.43,122.7 105.43,119.66 120.8,104.29 120.8,100.48 123.34,97.94 123.34,68.73 120.8,66.19 TEENSY.13
TSSP4
  Top 0.406: TSSP4.3 117.49,117.76 122.07,113.18 122.07,100.48 124.61,97.94 124.61,57.3 123.34,56.03 TEENSY.39
TSSP5  (via drill 0.51)
  Top 0.406: TSSP5.3 126.74,104.7 129.69,101.75 129.69,90.32 125.88,86.51 v125.88,59.84 | v127.15,54.38 127.15,48.41 124.61,45.87 TEENSY.35
  Bottom 0.406: v125.88,59.84 125.88,55.65 v127.15,54.38
TSSP6  (via drill 0.51)
  Top 0.406: TSSP6.3 129.92,89.28 127.15,86.51 127.15,61.11 v128.42,59.84 | v125.75,50.95 125.75,48.41 124.61,47.14 120.8,47.14 TEENSY.36
  Bottom 0.406: v128.42,59.84 128.42,53.62 v125.75,50.95
TSSP7  (via drill 0.51)
  Top 0.406: v129.69,59.84 129.69,71.27 130.96,72.54 TSSP7.3
  Bottom 0.406: v129.69,59.84 129.69,52.22 127.15,49.68 115.72,49.68 TEENSY.49
TSSP8
  Top 0.406: TSSP8.3 131.77,57.3 128.42,57.3 123.34,52.22 115.72,52.22 TEENSY.50
TSSP9
  Top 0.406: TSSP9.3 133.5,45.64 133.5,49.68 134.77,50.95 134.77,53.49 136.04,54.76 136.04,56.03 134.01,58.06 126.64,58.06 123.34,54.76 115.72,54.76 TEENSY.51
TSSP10  (via drill 0.51)
  Top 0.406: TSSP10.3 117.76,50.18 v116.99,50.95
  Bottom 0.406: v116.99,50.95 115.72,52.22 115.72,57.3 TEENSY.52
TSSP11  (via drill 0.51)
  Top 0.406: TSSP11.3 104.7,19.61 114.45,29.36 v115.72,29.36 | TEENSY.53 115.21,61.87 117.75,61.87 118.26,62.38 120.67,62.38 121.18,61.87 v122.07,61.87
  Bottom 0.406: v115.72,29.36 123.34,29.36 128.42,34.44 128.42,36.98 130.96,39.52 130.96,44.6 134.77,48.41 134.77,53.49 136.04,54.76 136.04,56.03 134.01,58.06 132.74,58.06 130.96,59.84 130.96,61.11 130.2,61.87 v122.07,61.87
TSSP12  (via drill 0.51)
  Top 0.406: TEENSY.46 113.18,42.06 113.18,29.36 104.29,20.47 v103.02,20.47
  Bottom 0.406: TSSP12.3 89.28,10.54 99.21,20.47 v103.02,20.47
TSSP13  (via drill 0.51)
  Top 0.406: TEENSY.45 110.64,44.6 110.64,39.52 111.91,38.25 111.91,29.36 104.29,21.74 v101.75,21.74 v101.76,21.73
  Bottom 0.406: TSSP13.3 77.39,5 86.51,12.85 89.05,12.85 97.94,21.74 v101.75,21.74 v101.76,21.73
TSSP14
  Top 0.406: TSSP14.3 61.92,12.85 91.59,12.85 101.75,23.01 104.29,23.01 110.64,29.36 110.64,38.25 109.37,39.52 109.37,45.87 TEENSY.44
TSSP15  (via drill 0.51)
  Top 0.406: TEENSY.43 108.1,47.14 108.1,39.52 109.37,38.25 109.37,29.36 104.29,24.28 101.75,24.28 91.59,14.12 61.11,14.12 59.43,12.44 48.82,12.44 v48.41,12.85
  Bottom 0.406: TSSP15.3 41.38,14.12 47.14,14.12 v48.41,12.85
TSSP16
  Top 0.406: TSSP16.3 35.21,22.24 43.33,14.12 59.84,14.12 61.11,15.39 91.59,15.39 101.75,25.55 104.29,25.55 108.1,29.36 108.1,38.25 106.83,39.52 106.83,47.14 110.64,50.95 110.64,54.76 TEENSY.42
TSSP17
  Top 0.406: TSSP17.3 23.42,35.3 43.33,15.39 59.84,15.39 61.11,16.66 91.59,16.66 101.75,26.82 104.29,26.82 106.83,29.36 106.83,38.25 105.56,39.52 105.56,47.14 108.1,49.68 108.1,54.76 TEENSY.41
TSSP18  (via drill 0.51)
  Top 0.406: TSSP18.3 9.14,50.72 43.2,16.66 59.84,16.66 61.11,17.93 91.59,17.93 101.75,28.09 104.29,28.09 105.56,29.36 v105.56,36.98
  Bottom 0.406: v105.56,36.98 110.64,42.06 110.64,59.84 TEENSY.40
TSSP19  (via drill 0.51)
  Top 0.406: TSSP19.3 3.2,68.5 3.2,80.16 v6.5,82.06 | v113.18,87.78 99.21,87.78 97.94,89.05 53.62,89.05 v48.54,94.13
  Bottom 0.406: v113.18,87.78 118.26,87.78 TEENSY.21 | v48.54,94.13 45.87,96.8 45.87,103.02 39.52,109.37 20.47,109.37 19.2,108.1 19.2,99.34 12.85,92.99 12.85,83.97 10.95,82.06 v6.5,82.06
TSSP20  (via drill 0.51)
  Top 0.406: v51.33,92.86 53.87,90.32 v113.18,90.32 | v14.12,92.86 12.85,91.59 6.5,91.59 5.23,90.32 5.23,85.7 TSSP20.3
  Bottom 0.406: v113.18,90.32 118.26,90.32 TEENSY.22 | v51.33,92.86 48.41,92.86 44.6,96.67 44.6,103.02 39.52,108.1 21.74,108.1 20.47,106.83 20.47,99.21 v14.12,92.86
TSSP21  (via drill 0.51)
  Top 0.406: v113.18,92.86 110.64,95.4 103.02,95.4 99.72,98.96 67.71,98.96 67.46,99.21 48.54,99.21 40.79,106.7 40.79,109.37 39.52,110.64 20.47,110.64 17.93,108.1 17.93,99.21 16.66,97.94 14.8,97.94 TSSP21.3
  Bottom 0.406: v113.18,92.86 118.26,92.86 TEENSY.23
TSSP22  (via drill 0.51)
  Top 0.406: v114.45,86.51 114.45,92.99 109.5,97.94 103.02,97.94 101.24,99.72 68.6,99.72 67.84,100.48 48.41,100.48 47.14,101.75 42.06,106.7 42.06,109.37 39.52,111.91 24.5,111.91 TSSP22.3
  Bottom 0.406: v114.45,86.51 116.99,83.97 TEENSY.20
TSSP23  (via drill 0.51)
  Top 0.406: v117.12,77.49 116.99,77.62 116.99,83.97 115.72,85.24 115.72,99.21 114.45,100.48 68.73,100.48 67.46,101.75 48.41,101.75 44.6,105.56 44.6,115.09 35.3,124.38 TSSP23.3
  Bottom 0.406: v117.12,77.49 118.26,76.35 TEENSY.17
TSSP24  (via drill 0.51)
  Top 0.406: TSSP24.3 50.72,129.92 54.76,125.88 89.05,125.88 v92.86,122.07 | v101.75,118.26 102.64,118.26 v116.61,104.29
  Bottom 0.406: v116.61,104.29 120.8,100.48 120.8,75.08 TEENSY.16 | v92.86,122.07 97.94,122.07 v101.75,118.26
TX(BLUETOOTH)  (via drill 0.51)
  Top 0.406: v92.86,91.59 64.92,91.59 63.65,92.86 v61.36,92.86
  Bottom 0.406: v92.86,91.59 95.4,89.05 95.4,87.78 TEENSY.7 | v61.36,92.86 53.49,92.86 47.14,99.21 47.14,107.08 42.31,111.91 38.25,111.91 36.98,113.18 BLUETOOTH.4
TX(CAM)  (via drill 0.51)
  Top 0.508: v86.51,96.67 v99.21,96.67
  Bottom 0.508: OPEN-MV.15 44.85,87.78 77.62,87.78 v86.51,96.67 | v99.21,96.67 TEENSY.0
TXE
  Bottom 0.305: U$4.6 23.51,56.53 28.09,61.11 52.96,61.11 JP1.5
TXN  (via drill 0.51)
  Top 0.305: v33.3,68.86 33.17,68.73 v33.17,66.19
  Bottom 0.305: U$4.4 21.51,56.27 16.66,61.11 11.58,61.11 10.31,62.38 10.31,63.02 9.55,63.78 9.55,64.92 9.55,65.3 9.55,65.43 11.58,67.46 21.74,67.46 23.14,68.86 v33.3,68.86 | v33.17,66.19 34.57,66.19 34.82,65.94 46.12,65.94 47.14,64.92 49.59,64.92 JP1.7
TXS
  Bottom 0.305: U$4.8 25.52,53.46 26.19,54.12 28.09,54.12 28.6,53.62 28.6,53.11 30.76,50.95 54.76,50.95 57.3,53.49 57.3,54.76 56.03,56.03 56.03,56.99 JP1.3
TXW
  Bottom 0.305: U$4.10 27.82,52.49 30.63,49.68 54.76,49.68 58.57,53.49 58.57,55.94 JP1.2

## Text on the board
tPlace: BRISBANE BOYS' COLLEGE ROBOTICS - Gamma / M.Feros / G.Gannon / A.Bogahawatta
bPlace: RX-North | TX-North | RX-East | TX-East | RX-South | TX-South | TX-West | RX-West